# Altium PCB hazi_kiindulas.PcbDoc
Units mil, origin at the board's own origin, x right, y up, seen from the top; angles counter-clockwise.
Board outline 3550 x 2300 mil, 2 copper layers (Top Layer, Bottom Layer); 64 components, 87 nets, 342 pads, 22 vias.
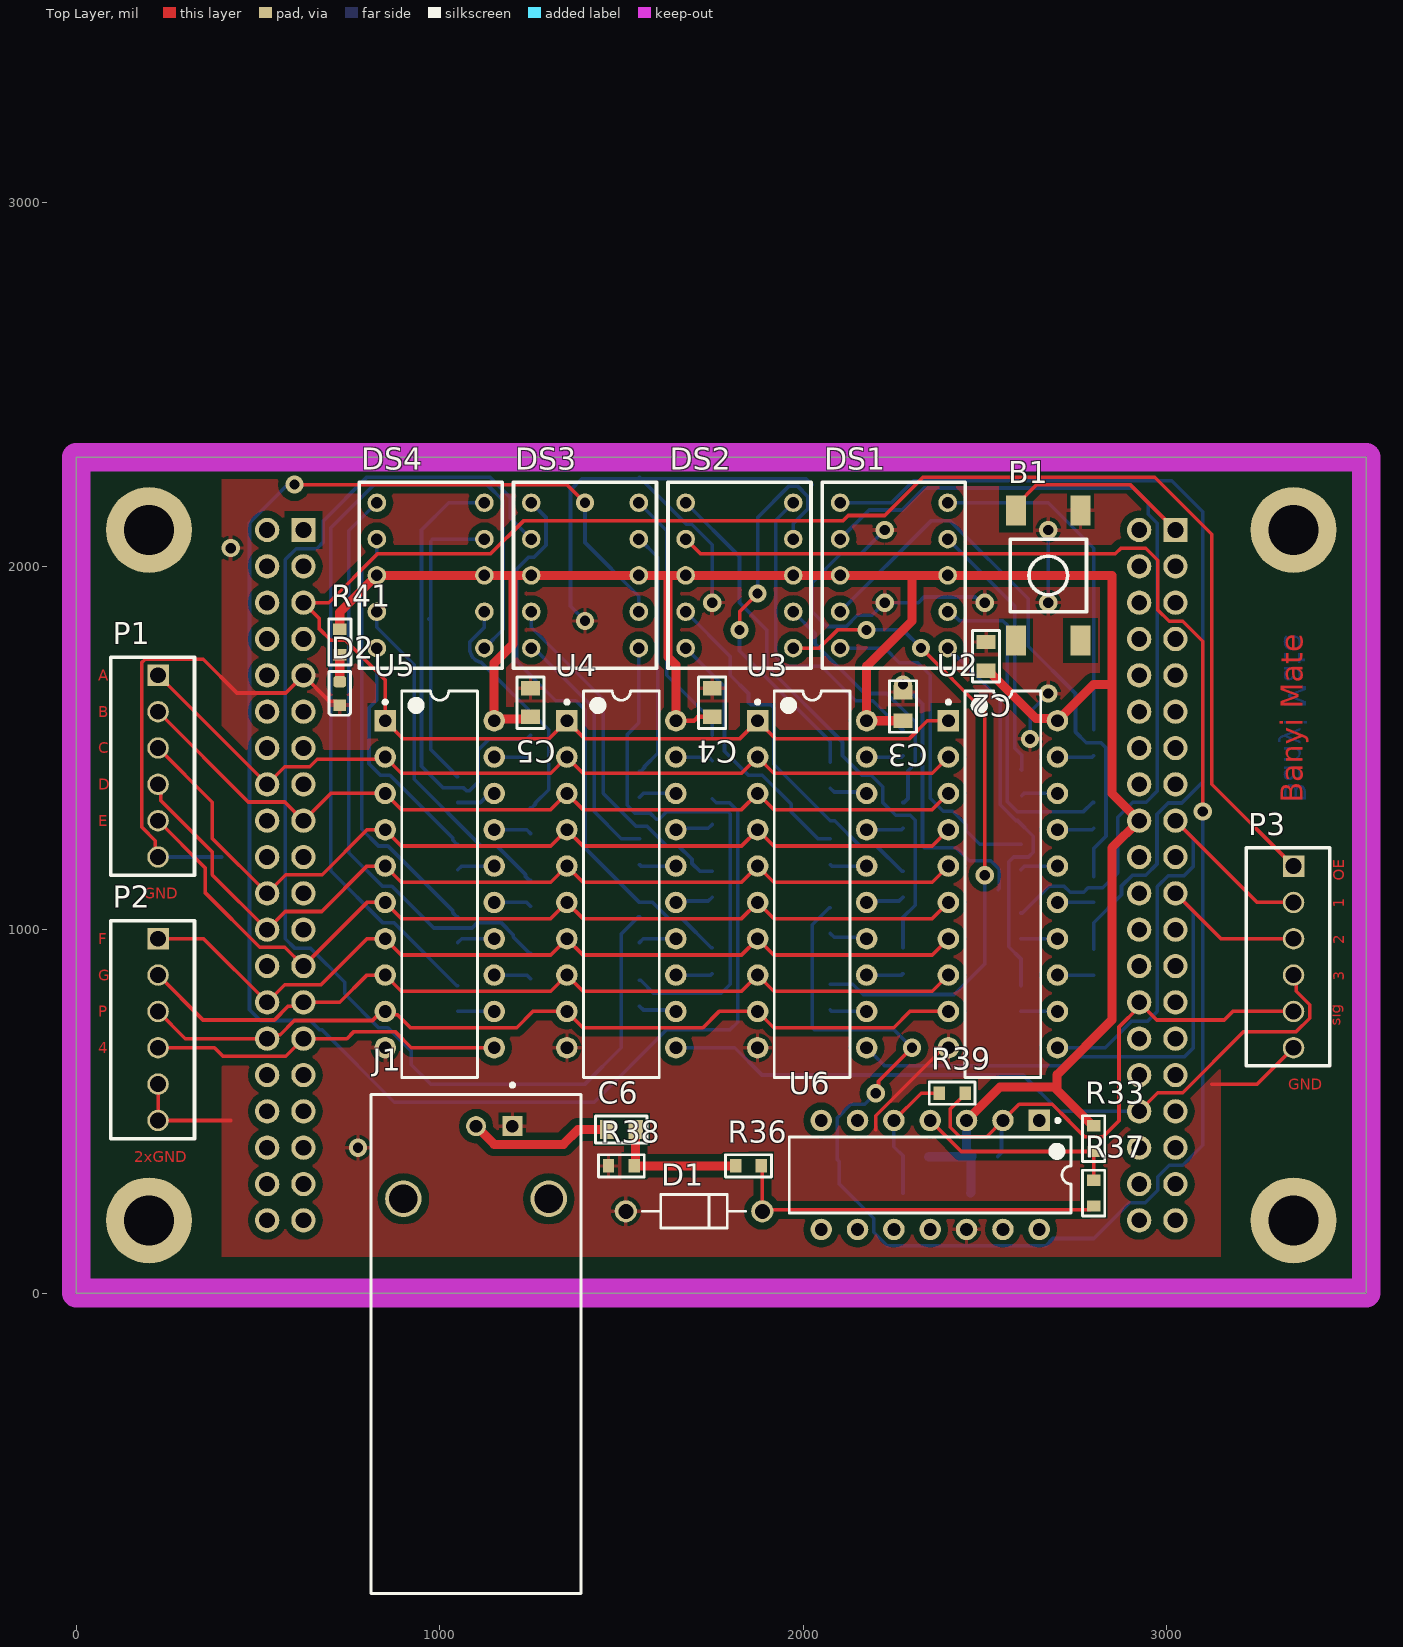
[diagram p0: Top Layer view]
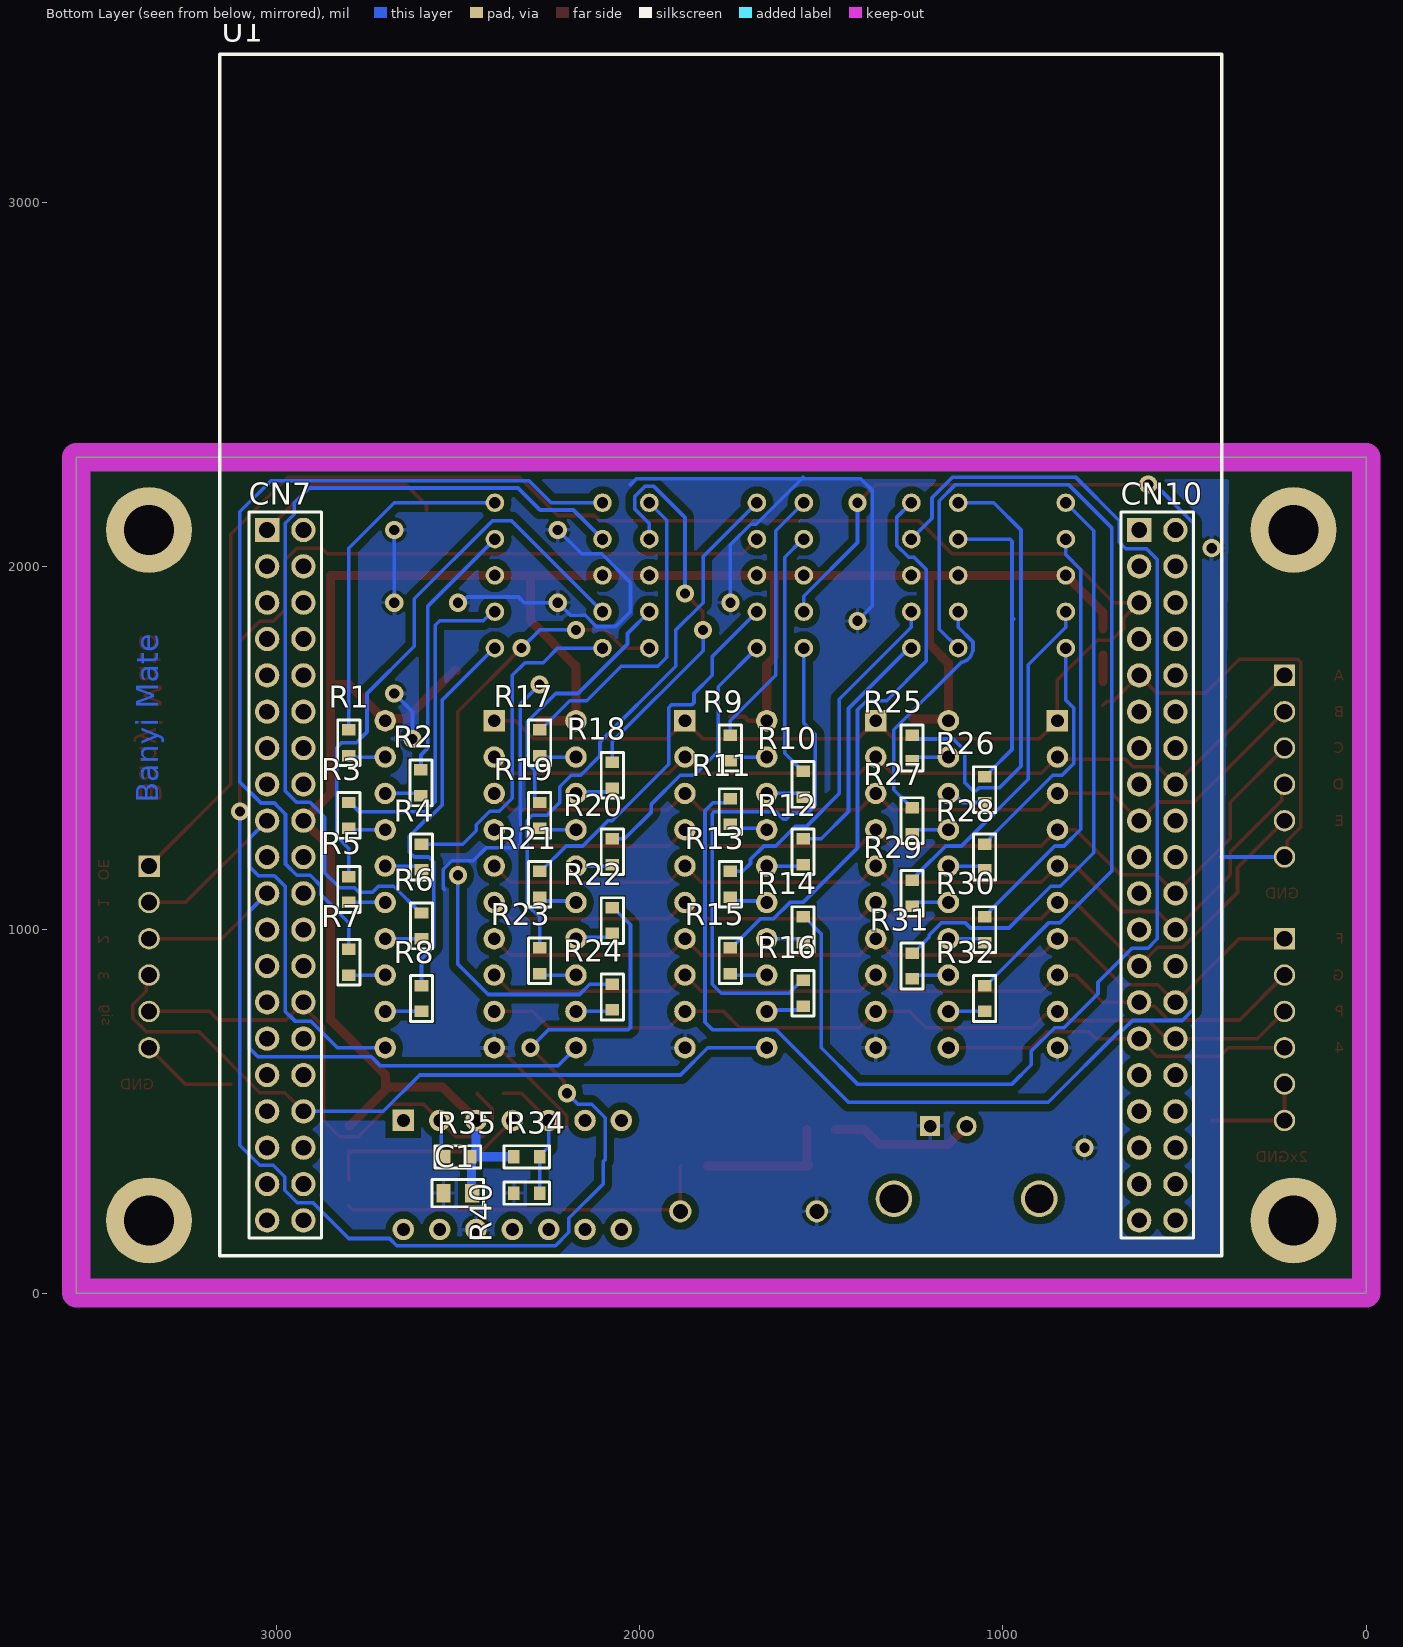
[diagram p1: Bottom Layer view, seen from below]
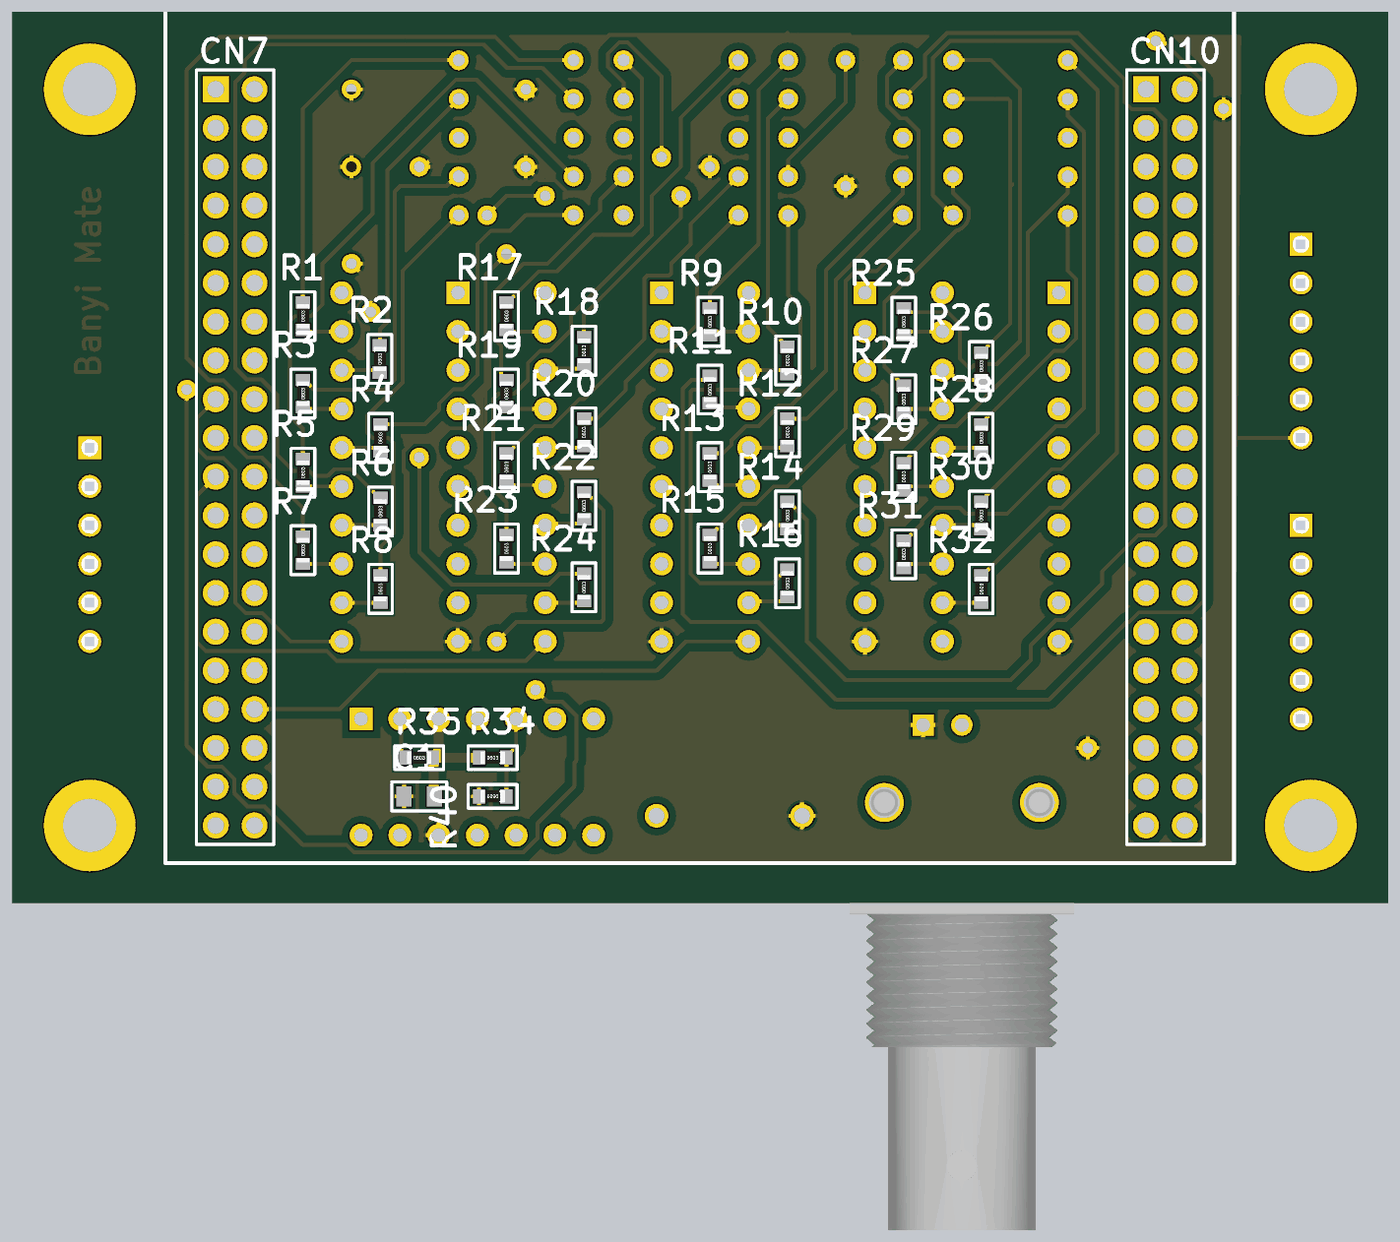
[diagram p2: 3D render of the assembled board from below, using the file's embedded part models]

## Layer stack, top to bottom
Top Solder: solder mask 0.4, Solder Resist, Dk 3.5
Top Layer: signal copper 1.4
Dielectric 1: dielectric 12.6, FR-4, Dk 4.8
Bottom Layer: signal copper 1.4
Bottom Solder: solder mask 0.4, Solder Resist, Dk 3.5

## Board outline
0,0 3550,0 3550,2300 0,2300

## Design rules (kind name [scope] priority, off if disabled: settings)
Clearance [All] p1: gap=10 ignorepadtopadclearanceinfootprint=FALSE except(0: Arc-Hole Track-Hole SMDPad-Hole THPad-Hole Via-Hole Fill-Hole Poly-Hole Region-Hole Text-Hole; 20: Arc-Poly Track-Poly SMDPad-Poly THPad-Poly Via-Poly Fill-Poly Poly-Poly)
HoleSize [All] p1: absolutevalues=TRUE maxlimit=196.85 minlimit=1 maxpercent=80.000 minpercent=20.000
PolygonConnect [All] p1: connectstyle=Relief reliefconductorwidth=10 reliefentries=4 polygonreliefangle="90 Angle" airgapwidth=10
RoutingVias [All] p1: holewidth=28 width=50 viastyle="Through Hole" minholewidth=28 minwidth=50 maxholewidth=28 maxwidth=50
SMDNeckDown [All] p1: percent=50.000
SolderMaskExpansion [All] p1: expansion=4 istentingtop=FALSE
Width [All] p1: maxlimit=100 minlimit=10 preferedwidth=10
29 further rules are at their usual default settings.

## Components (designator, comment, footprint, x,y, rotation, side; value= is the part's Value field where it differs from the comment)
B1 "Button" FP_BTN_SMD 2675,1975 r0 top
C1 "100nF" FP_0805_CAP_085 2500,275 r0 bottom
C2 "100nF" FP_0805_CAP_085 2503.51,1752.14 r270 top
C3 "100nF" FP_0805_CAP_085 2275,1614.37 r270 top
C4 "100nF" FP_0805_CAP_085 1750,1625 r270 top
C5 "100nF" FP_0805_CAP_085 1250,1625 r270 top
C6 "100nF" FP_0805_CAP_085 1500,450 r0 top
D1 "1N4007G" ONSC-AXIAL_LEAD-2-59-10_P 1700,225 r180 top
D2 "LED" FP_0805_LED_RED 725,1650 r270 top
DS1 "7SEG" FP_7SEG 2250,1975 r0 top
DS2 "7SEG" FP_7SEG 1825,1975 r0 top
DS3 "7SEG" FP_7SEG 1400,1975 r0 top
DS4 "7SEG" FP_7SEG 975,1975 r0 top
J1 "1-1337543-0" TECO-1-1337543-0_V 1100,259.25 r180 top
P1 "Connector" FP_CONN6_TAP_254MM 225,1700 r180 top
P2 "Connector" FP_CONN6_TAP_254MM 225,975 r180 top
P3 "Connector" FP_CONN6_TAP_254MM 3350,1175 r180 top
R1 "1K" FP_0603_RES 2799.99,1514.57 r90 bottom
R2 "1K" FP_0603_RES 2601.63,1404.13 r90 bottom
R3 "1K" FP_0603_RES 2799.99,1314.57 r90 bottom
R4 "1K" FP_0603_RES 2600,1200 r90 bottom
R5 "1K" FP_0603_RES 2800,1110.43 r90 bottom
R6 "1K" FP_0603_RES 2600,1010.43 r90 bottom
R7 "1K" FP_0603_RES 2800,910.43 r90 bottom
R8 "1K" FP_0603_RES 2600,810.43 r90 bottom
R9 "1K" FP_0603_RES 1750,1500 r90 bottom
R10 "1K" FP_0603_RES 1550,1400 r90 bottom
R11 "1K" FP_0603_RES 1750,1325 r90 bottom
R12 "1K" FP_0603_RES 1549.99,1214.57 r90 bottom
R13 "1K" FP_0603_RES 1750,1125 r90 bottom
R14 "1K" FP_0603_RES 1550,1000 r90 bottom
R15 "1K" FP_0603_RES 1749.99,914.57 r90 bottom
R16 "1K" FP_0603_RES 1550,825 r90 bottom
R17 "1K" FP_0603_RES 2274.99,1514.57 r90 bottom
R18 "1K" FP_0603_RES 2075,1425 r90 bottom
R19 "1K" FP_0603_RES 2274.99,1314.57 r90 bottom
R20 "1K" FP_0603_RES 2074.99,1214.57 r90 bottom
R21 "1K" FP_0603_RES 2275,1125 r90 bottom
R22 "1K" FP_0603_RES 2075,1025 r90 bottom
R23 "1K" FP_0603_RES 2274.99,914.57 r90 bottom
R24 "1K" FP_0603_RES 2074.99,814.57 r90 bottom
R25 "1K" FP_0603_RES 1250,1500 r90 bottom
R26 "1K" FP_0603_RES 1050,1385.43 r90 bottom
R27 "1K" FP_0603_RES 1250,1300 r90 bottom
R28 "1K" FP_0603_RES 1050,1200 r90 bottom
R29 "1K" FP_0603_RES 1250,1100 r90 bottom
R30 "1K" FP_0603_RES 1050,1000 r90 bottom
R31 "1K" FP_0603_RES 1250,900 r90 bottom
R32 "1K" FP_0603_RES 1050,810.43 r90 bottom
R33 "100K" FP_0603_RES 2800,425 r270 top
R34 "100K" FP_0603_RES 2310.43,374.99 r180 bottom
R35 "5K" FP_0603_RES 2500,375 r180 bottom
R36 "5K" FP_0603_RES 1850,350 r180 top
R37 "5K" FP_0603_RES 2800,275 r270 top
R38 "10K" FP_0603_RES 1500,350 r0 top
R39 "20M" FP_0603_RES 2410.43,550 r0 top
R40 "10K" FP_0603_RES 2310.43,275 r0 bottom
R41 "330" FP_0603_RES 725,1791.88 r90 top
U1 "NUCLEO-F446RE" FP_NUCLEO-64 3025,2100 r180 bottom locked
U2 "SN74HCT573N" N0020A 2550,1125 r0 top
U3 "SN74HCT573N" N0020A 2025,1125 r0 top
U4 "SN74HCT573N" N0020A 1500,1125 r0 top
U5 "SN74HCT573N" N0020A 1000,1125 r0 top
U6 "LM339N" N0014A 2350,325 r270 top

## Footprints (in the part's own frame and the unit in brackets; to place one, negate y for a bottom-side part, rotate by r counter-clockwise, add the part's x,y. Pads: shape width x height; smd on the part's side, far side on the other; paste and mask are expansions set on the pad)
FP_7SEG [mm]
  round 1.3 hole 0.8: 1(-3.76,5.08) 2(-3.76,2.54) 3(-3.76,0) 4(-3.76,-2.54) 5(-3.76,-5.08) 6(3.76,-5.08) 7(3.76,-2.54) 8(3.76,0) 9(3.76,2.54) 10(3.76,5.08)
  silkscreen extent -5,-6.5 5,6.5, body extent -5.13,-6.63 5.13,6.63, height 7
FP_0603_RES [mm] "0603 ellenállás"
  rect 0.8x0.95 smd: 1(-0.9,0) 2(0.9,0)
  silkscreen extent -1.6,-0.77 1.6,0.78, body extent -0.8,-0.4 0.8,0.4, height 0.44
FP_0805_CAP_085 [mm] "0805 kapacitás YAGEO 0.85mm magas"
  rect 1x1.3 smd: 1(-1,0) 2(1,0)
  silkscreen extent -1.8,-0.95 1.8,0.95, body extent -1,-0.64 1.03,0.64, height 0.85
FP_0805_LED_RED [mm] "0805 méretû piros LED"
  rrect50% 0.8x0.9 smd: A(-0.825,0)
  rect 0.8x0.9 smd: K(0.825,0)
  silkscreen extent -1.55,-0.75 1.53,0.75, body extent -1,-0.62 1.02,0.62, height 1.1
FP_BTN_SMD [mm] "SMD Push Button 6x6mm"
  rect 1.4x2.1 smd: 1(2.25,4.55) 2(2.25,-4.55) 3(-2.25,4.55) 4(-2.25,-4.55)
  silkscreen extent -2.67,-2.54 2.67,2.54, body extent -3,-5 3,5, height 5.1
FP_CONN6_TAP_254MM [mm] "álló hat pólusú tápcsatlakozó 2.54mm"
  rect 1.5x1.5 hole 1.1: 1(0,0)
  round 1.5 hole 1.1: 2(0,2.54) 3(0,5.08) 4(0,7.62) 5(0,10.16) 6(0,12.7)
  silkscreen extent -2.54,-1.27 3.3,13.97, body extent -2.52,-1.27 3.28,13.97, height 11.56
FP_NUCLEO-64 [mm]
  round 1.7 hole 1.1: 0(0,-48.26) 0(2.54,-48.26) 0(60.96,-48.26) 0(63.5,-48.26) 2(2.54,0) 3(0,-2.54) 4(2.54,-2.54) 5(0,-5.08) 6(2.54,-5.08) 7(0,-7.62) 8(2.54,-7.62) 9(0,-10.16) 10(2.54,-10.16) 11(0,-12.7) 12(2.54,-12.7) 13(0,-15.24) 14(2.54,-15.24) 15(0,-17.78) 16(2.54,-17.78) 17(0,-20.32) 18(2.54,-20.32) 19(0,-22.86) 20(2.54,-22.86) 21(0,-25.4) 22(2.54,-25.4) 23(0,-27.94) 24(2.54,-27.94) 25(0,-30.48) 26(2.54,-30.48) 27(0,-33.02) 28(2.54,-33.02) 29(0,-35.56) 30(2.54,-35.56) 31(0,-38.1) 32(2.54,-38.1) 33(0,-40.64) 34(2.54,-40.64) 35(0,-43.18) 36(2.54,-43.18) 37(0,-45.72) 38(2.54,-45.72) 40(63.5,0) 41(60.96,-2.54) 42(63.5,-2.54) 43(60.96,-5.08) 44(63.5,-5.08) 45(60.96,-7.62) 46(63.5,-7.62) 47(60.96,-10.16) 48(63.5,-10.16) 49(60.96,-12.7) 50(63.5,-12.7) 51(60.96,-15.24) 52(63.5,-15.24) 53(60.96,-17.78) 54(63.5,-17.78) 55(60.96,-20.32) 56(63.5,-20.32) 57(60.96,-22.86) 58(63.5,-22.86) 59(60.96,-25.4) 60(63.5,-25.4) 61(60.96,-27.94) 62(63.5,-27.94) 63(60.96,-30.48) 64(63.5,-30.48) 65(60.96,-33.02) 66(63.5,-33.02) 67(60.96,-35.56) 68(63.5,-35.56) 69(60.96,-38.1) 70(63.5,-38.1) 71(60.96,-40.64) 72(63.5,-40.64) 73(60.96,-43.18) 74(63.5,-43.18) 75(60.96,-45.72) 76(63.5,-45.72)
  rect 1.7x1.7 hole 1.1: 1(0,0) 39(60.96,0)
  silkscreen extent -3.3,-50.73 66.72,33.25, body extent -3.3,-50.72 66.72,33.25, height 11
N0014A [mm] "DIP, 14-Leads, Body 19.7x6.6mm, Pitch 2.54mm"
  rect 1.5x1.5 hole 0.9: 1(-3.81,7.62)
  round 1.5 hole 0.9: 2(-3.81,5.08) 3(-3.81,2.54) 4(-3.81,0) 5(-3.81,-2.54) 6(-3.81,-5.08) 7(-3.81,-7.62) 8(3.81,-7.62) 9(3.81,-5.08) 10(3.81,-2.54) 11(3.81,0) 12(3.81,2.54) 13(3.81,5.08) 14(3.81,7.62)
  silkscreen extent -3.93,-9.85 2.65,9.85, body extent -3.95,-9.85 3.95,9.85, height 5.08
N0020A [mm] "DIP, 20-Leads, Body 26.9x6.6mm, Pitch 2.54mm"
  rect 1.5x1.5 hole 0.9: 1(-3.81,11.43)
  round 1.5 hole 0.9: 2(-3.81,8.89) 3(-3.81,6.35) 4(-3.81,3.81) 5(-3.81,1.27) 6(-3.81,-1.27) 7(-3.81,-3.81) 8(-3.81,-6.35) 9(-3.81,-8.89) 10(-3.81,-11.43) 11(3.81,-11.43) 12(3.81,-8.89) 13(3.81,-6.35) 14(3.81,-3.81) 15(3.81,-1.27) 16(3.81,1.27) 17(3.81,3.81) 18(3.81,6.35) 19(3.81,8.89) 20(3.81,11.43)
  silkscreen extent -3.93,-13.5 2.65,13.5, body extent -3.95,-13.45 3.95,13.45, height 5.08
ONSC-AXIAL_LEAD-2-59-10_P [mm] "AXIAL, 2-Leads, Diameter 2.35mm"
  round 1.55 hole 1.05: 1(-4.77,0) 2(4.77,0)
  silkscreen extent -3.6,-1.18 3.6,1.18
TECO-1-1337543-0_V [mm] "SMD, 2-Leads, Body 34.9x14.7mm, Pitch 2.54mm"
  rect 1.4x1.4 hole 0.89: 1(-2.54,-5.08)
  round 1.4 hole 0.89: 2(0,-5.08)
  round 2.55 hole 2.01: MH1(-5.08,0) MH2(5.08,0)
  silkscreen extent -7.35,-8.07 7.35,27.6, body extent -7.35,-7.1 7.35,28.05, height 15.8

## Part data
B1: library part "Button 4P", "Push button", Name="TACT 6x 6 4P SPST 2 FSM4JSMA (TYC) 50mA 12VDC SMD H=5mm 160g BLACK B. 4-1437565-1", Reference=45-05-43, Supplier=Lomex
C1 C2 C3 C4 C5 C6: library part CAP, "Capacitor", Name="100nF 0805 10% 50V X7R 0805B104K500CT (WAL)", Reference=82-10-76, Supplier=Lomex
D1: library part CMP-0902-00143-1, "Standard Recovery Rectifier, 2-Pin Axial_Lead, Pb-Free, Bulk Bag", Manufacturer="On Semiconductor", ComponentLink1Description="Manufacturer URL", ComponentLink1URL=http://www.onsemi.com/, ComponentLink2Description=Datasheet, ComponentLink2URL=http://www.onsemi.com/pub_link/Collateral/1N4001-D.PDF, ComponentLink3Description="Package Specification", ComponentLink3URL=http://www.onsemi.cn/pub_link/Collateral/59-10.PDF, DatasheetVersion="Rev. 13", IFSM Max (A)=30, IO(rec) Max (A)=1, Mounting Technology="Through Hole", Name="0.15A 100V SWITCH 1N4148TR (VIS) trr<4nsec DO-35", PackageDescription="2-Pin, Axial Lead, Diameter 2.35 mm", PackageReference=AXIAL_LEAD-2-59-10, PackageVersion="Rev. U, 02/2005", Packing="Bulk Bag", PartNumber=1N4007G, Reference=16-01-04, RoHS=TRUE, Supplier=Lomex, Type="Standard Recovery", VRRM Max (V)=1000
D2: "Typical RED GaAs LED", Name="2012 GREEN 565nm 12mcd KP-2012SGD (KIN) GRE.DIFF. 2x1.2x1.1mm 0805 120°", Reference=95-00-21, Supplier=Lomex
DS1 DS2 DS3 DS4: "Common Anode 7 Segment Display", Name="FYS-3911BUHR-21 (FYL) 7 SEG SRED COM.AN.", Reference=35-03-94, Supplier=Lomex
J1: library part CMP-2000-05853-1, "Female Connector, Pitch 2.54 mm, 1 x 2 Position, Height 15.8 mm, Tail Length 3.8 mm,  / -55 to 85 degC, RoHS, Bulk", Frequency Max=4GHz, Manufacturer="TE Connectivity", Package Description="Female Connector, Pitch 2.54 mm, 1 x 2 Position, Height 15.8 mm, Tail Length 3.8 mm", Coaxial Cable Types=-, Coaxial Termination=Solder, Connector Body Style=RightAngleJack, Connector Mounting=PCBMount, Connector Type=BNCCoaxial, Contact Material=Brass, Contact Plating=GoldPlatedContacts, Datasheet URL=http://www.te.com/commerce/DocumentDelivery/DDEController?Action=showdoc&DocId=Customer+Drawing%7F1337543%7FG%7Fpdf%7FEnglish%7FENG_CD_1337543_G.pdf%7F1-1337543-0, Datasheet Version="Rev. G, 12/2012", Impedance=50ohm, Manufacturer URL=http://www.te.com/, Mounting Technology=ThroughHole, Name="BNC 1 P ANYA 90° BNC-S07HP (T-T) H-F 15.8mm 50R NYÁK 90° SZIGETELT CSAVAR NÉLKÜL !!", Package Reference=1-1337543-0, Product Range=-, Reference=43-15-22, Supplier=Lomex, SVHC=ToBeAdvised
P1 P2 P3: library part Connector_6pin, "6pin connector"
R1 R2 R3 R4 R5 R6 R7 R8 R9 R10 R11 R12 R13 R14 R15 R16 R17 R18 R19 R20 R21 R22 R23 R24 R25 R26 R27 R28 R29 R30 R31 R32 R33 R34 R35 R36 R37 R38 R39 R40 R41: library part RES, "Resistor", Supplier=Lomex
  R1 R2 R3 R4 R5 R6 R7 R8 R9 R10 R11 R12 R13 R14 R15 R16 R17 R18 R19 R20 R21 R22 R23 R24 R25 R26 R27 R28 R29 R30 R31 R32: Name="1K00 0603 5% WR06X102JTL 0.1W (WAL)", Reference=81-27-92
  R33 R34: Name="100K 0603 5% RC0603JR-10100KL 0.1W (YAG)", Reference=81-34-88
  R35 R36 R37: Name="5K10 0603 5% WR06X512JTL 0.1W (WAL)", Reference=81-28-96
  R38 R40: Name="10K0 0603 5% WR06X103JTL 0.1W (WAL)", Reference=81-29-03
  R39: Name="20M0 0603 5% RC0603JR-0720ML 0.1W (YAG)", Reference=81-27-41
  R41: Name="330R 0603 5% WR06X331JTL 0.1W (WAL)", Reference=81-17-48
U2 U3 U4 U5: library part CMP-1621-00374-2, "Octal Transparent D-Type Latches With 3-State Outputs, N0020A, TUBE", F @ Nom Voltage(Max)(Mhz)=25, Generic Part Number=SN74HCT573, ICC @ Nom Voltage(Max)(mA)=0.08, Manufacturer="Texas Instruments", Operating Temperature Range(C)="-40 to 85", Rating=Catalog, tpd @ Nom Voltage(Max)(ns)=40, Voltage(Nom)(V)=5, 3-State Output=Yes, Bits(#)=8, Code_JEDEC=MS-001, DatasheetVersion=SCLS176E, Input Type=TTL, Logic=True, Name="SN74HCT573N (TI) 8xD-TYPE TRANSPARENT LATCH 3-STATE OUTPUT DIP-20", Output Drive (IOL/IOH)(Max)(mA)=6/-6, Output Logic=Non-inverted, Output Type=CMOS, PackageReference=N0020A, Reference=30-09-06, Schmitt Trigger=No, Static Current=0.08, Supplier=Lomex, Technology Family=HCT, VCC(Max)(V)=5.5, VCC(Min)(V)=4.5
U6: library part CMP-0055-00143-3, "Low Power Low Offset Voltage Quad Comparator, 14-pin MDIP", Manufacturer="Texas Instruments", Package Reference=N0014A, PackageTopMarking=NSUZXYYTTE#*LM339N, PowerWise=N, Code_JEDEC=MS-001-AA, ComponentLink1Description="Datasheet URL", ComponentLink1URL=http://www.ti.com/general/docs/lit/getliterature.tsp?genericPartNumber=LM339&fileType=pdf, CompType=Amplifiers, Name="LM339N (TI) 4xVOLTAGE COMPARATOR DIP-14", PackageDescription="MDIP, .750 x .250 x.130in, 14 Lead, .100in Pitch", PinCount=14, Reference=Lomex, RoHS=N, Supplier=32-17-66
U1: Name="Nucleo F446RE", Reference=NUCLEO, Supplier=Tanszék

## Free pads (board coordinates)
  round 236.22 hole 137.8: ""(200,200) ""(200,2100) ""(3350,200) ""(3350,2100)

## Via types
v1: diameter 50, hole 28, Top Layer to Bottom Layer, 22 vias

## Nets (pads, with @x,y where several pads share a name; then routed paths per layer and width w, separated by ;. In a path a pad name is that pad's centre, name@x,y a point inside that pad or via, vN(x,y) a via of type N, cw(c..) or ccw(c..) an arc to the next point about the centre after c; other vN are vias at no path point)
GND: B1.1 C1.2 C2.1 C3.1 C4.1 C5.1 D1.2 D2.K J1.1 P1.6 P2.5 P2.6 P3.6 R38.1 R40.2 U1.47 U2.10 U3.10 U4.10 U5.10 U6.12 | length 5729.9
  Top Layer w10: P2.5 P2.6 425,475 ; P1.6 217.5,1207.5 217.5,1244.53 180.47,1281.56 180.47,1735.74 189.26,1744.53 349.31,1744.53 442.3,1651.54 576.54,1651.54 U1.47 696.73,1628.27 714.25,1628.27 D2.K ; 2200,450 2200,487.97 2387.03,675 U2.10 ; 3125,575 3250,575 P3.6
  Bottom Layer w10: P1.6 400,1200 ; v1(1400,1850) 1360,1890 1360,2210 1390.84,2240.84 1553.73,2240.84 ; 1550,2245.63 1550,2244.56 1553.73,2240.84 ; v1(1750,1900) 1750,2059.37 1693.78,2115.59 1678.97,2115.59 1553.73,2240.84 ; 2025,2225 2009.16,2240.84 1553.73,2240.84 ; v1(2225,2100) 2159.41,2034.41 2103.97,2034.41 2025,1955.44 2025,1875 2065.59,1834.41 2118.78,1834.41 2149.37,1865 2190,1865 v1(2225,1900) 2317.54,1900 2333.13,1915.59 2473.59,1915.59 2489.18,1900 v1(2500,1900) ; v1(2275,1675) 2328.71,1621.29 2328.71,1230.86 2334.56,1225 2422.3,1225 2457.3,1190 2516.57,1190 2540,1166.57 2540,1112.7 2537.3,1110 ; v1(2625,1525) 2625,1600 v1(2675,1650) ; v1(2675,1900) v1(2675,2100)
  other v1: 775,400 425,2050
LE1: P3.2 U1.17 U2.11 | length 1346
  Top Layer w10: U1.17 3250,1075 P3.2
  Bottom Layer w10: U2.11 2831.46,675 2904.93,748.46 2948.46,748.46 2975,775 2975,1118.54 3004.93,1148.46 3048.46,1148.46 3073.46,1173.46 3073.46,1251.54 U1.17
LE2: P3.3 U1.21 U3.11 | length 1762.6
  Top Layer w10: U1.21 3150,975 P3.3
  Bottom Layer w10: U3.11 2225,625 2712.97,625 2737.97,650 3050,650 3073.46,673.46 3073.46,1051.54 U1.21
LE3: P3.4 U1.34 U4.11 | length 2060.2
  Top Layer w10: U1.34 2976.54,551.54 3045.07,551.54 3213.07,719.53 3357.5,719.53 3394.53,756.56 3394.53,793.44 3357.5,830.47 3357.5,867.5 P3.4
  Bottom Layer w10: U4.11 1812.03,675 1887.03,600 2605.27,600 2705.27,500 U1.34
LE4: P2.4 U1.67 U5.11 | length 981.3
  Top Layer w10: P2.4 379.94,675 403.41,651.54 576.54,651.54 U1.67 744.66,700 764.19,719.53 877.19,719.53 921.72,675 U5.11
n_OE: P3.1 U1.43 U2.1 U3.1 U4.1 U5.1 | length 5830.9
  Top Layer w10: U2.1 2341.49,1575 2291.49,1525 1925,1525 U3.1 1825,1525 1400,1525 U4.1 1300,1525 900,1525 U5.1 850,1687.11 740.54,1796.56 700.08,1796.56 667.99,1828.65 667.99,1857.01 U1.43 694.56,1900 828.97,2034.41 1139.85,2034.41 1230.44,2125 2109.37,2125 2124.37,2140 2225.1,2140 2330.73,2245.63 2587.8,2245.63 2775,2245.63 2775.63,2245 2968.14,2245 3125,2088.14 3125,1400 P3.1
NetB1_3: B1.3 U1.1 | length 527.8
  Top Layer w10: B1.3 2586.42,2167.91 2643.5,2225 2900,2225 U1.1
NetC6_1: C6.1 J1.2 | length 398.3
  Top Layer w25: J1.2 1150.06,409.19 1236.88,409.19 1340.22,409.19 1381.02,450 C6.1
NetC6_2: C6.2 R36.2 R38.2 | length 380.8
  Top Layer w25: C6.2 1539.37,356.9 1535.43,352.96 R38.2 R36.2
NetD1_1: D1.1 R36.1 R37.2 | length 1044.2
  Top Layer w10: R36.1 1887.8,347.64 D1.1 1891.61,228.82 2789.26,228.82 R37.2
NetD2_1: D2.A R41.1 | length 74
  Top Layer w25: D2.A R41.1
NetDS1_1: DS1.1 R7.2 | length 2430.4
  Bottom Layer w10: DS1.1 2243.68,2175 2304.27,2235.59 3014.41,2235.59 3100,2150 3100,1406.46 3042,1348.46 3004.93,1348.46 2995,1338.54 2974.23,1317.77 2974.23,1180.69 2943.54,1150 2906.46,1150 2876.54,1120.07 2876.54,1095.87 2800.01,1019.34 R7.2
NetDS1_2: DS1.2 R6.2 | length 2344.6
  Bottom Layer w10: DS1.2 2181.97,2155 2273.68,2155 2334.27,2215.59 2909.41,2215.59 2950,2175 2950,2143.54 2975,2118.54 2975,1381.46 2944.31,1350.77 2907.23,1350.77 2866.07,1309.61 2866.07,1156.27 2824.92,1115.12 2784.46,1115.12 2772.17,1102.83 2735.14,1102.83 2718.44,1119.53 2676.62,1119.53 2602.96,1045.87 R6.2
NetDS1_4: DS1.4 R5.2 | length 1601.2
  Bottom Layer w10: DS1.4 2351.97,2125 2405.44,2125 2620,1910.44 2620,1780 2750,1650 2750,1544.34 2779.77,1514.56 2820.23,1514.56 2833.7,1501.09 2833.7,1257.18 2800.01,1223.48 R5.2
NetDS1_5: DS1.5 R4.2 | length 929
  Bottom Layer w10: DS1.5 2225,1775 2265,1735 2315,1735 2350,1700 2350,1362.03 2386.19,1325.84 2412.13,1325.84 2449.27,1288.7 2449.27,1272.57 2486.41,1235.43 R4.2
NetDS1_6: DS1.6 R8.2 | length 1096.3
  Bottom Layer w10: DS1.6 2400,1775 2542.5,1632.5 2542.5,1343.89 2585.75,1300.64 2590.46,1300.64 2633.71,1257.4 2633.71,1213.47 2620.23,1200 2579.77,1200 2566.3,1186.53 2566.3,953.04 2600.01,919.33 R8.2
NetDS1_7: DS1.7 R3.2 | length 924.4
  Bottom Layer w10: DS1.7 2405.44,1875 2430.44,1850 2550,1850 2562.5,1837.5 2562.5,1352.17 2589.67,1325 2772.05,1325 2797.05,1350 R3.2
NetDS1_9: DS1.9 R2.2 | length 722.1
  Bottom Layer w10: DS1.9 2582.5,1890.53 2582.5,1500 2601.64,1480.86 R2.2 R2.2@2600,1441.21
NetDS1_10: DS1.10 R1.2 | length 953.7
  Bottom Layer w10: DS1.10 2675,2175 2800,2050 R1.2
NetDS2_1: DS2.1 R23.2 | length 1539.5
  Bottom Layer w10: DS2.1 1825,2026.97 1825,1900 1900,1825 1900,1725 2108.71,1516.29 2108.71,1478.32 2162.03,1425 2187.97,1425 2219.53,1393.44 2219.53,1349.81 2254.78,1314.56 2295.23,1314.56 2308.71,1301.08 2308.71,1067.61 2275,1033.9 R23.2
NetDS2_2: DS2.2 R22.2 | length 5383.2
  Top Layer w10: DS2.2 1717.56,2034.41 2859.41,2034.41 2875,2050 2943.54,2050 2976.54,2017 2976.54,1879.93 3008,1848.46 3045.07,1848.46 3100,1793.54 v1(3100,1325) ; v1(2200,550) 2207.65,557.65 2207.65,582.65 v1(2300,675)
  Bottom Layer w10: R22.2 2072.05,1060.43 2025,1013.38 2025,730.86 2030.86,725 2250,725 v1(2300,675) ; v1(2200,550) 2169.53,519.53 2131.56,519.53 2094.53,482.5 2094.53,367.37 2100,361.9 2100,300 2194.53,205.47 2194.53,167.5 2231.56,130.47 2668.44,130.47 2687.97,150 2800,150 2898.46,248.46 2942,248.46 2976.54,283 2976.54,320.07 3008,351.54 3045.07,351.54 3100,406.46 v1(3100,1325)
NetDS2_4: DS2.4 R21.2 | length 1029.8
  Bottom Layer w10: DS2.4 1800,1751.97 1800,1700 1850,1650 1850,1625.39 1855.86,1619.53 1910.74,1619.53 1919.53,1610.74 1919.53,1455.47 2075,1300 2087.03,1300 2156.56,1230.47 2202.01,1230.47 2272.05,1160.43 R21.2
NetDS2_5: DS2.5 R20.2 | length 731.9
  Bottom Layer w10: DS2.5 1783.71,1668.26 1783.71,1491.29 1850,1425 1887.97,1425 1967.37,1345.6 1967.37,1323.93 2041.3,1250 R20.2
NetDS2_6: DS2.6 R24.2 | length 1806.8
  Top Layer w10: DS2.6 2044.56,1775 2094.56,1825 v1(2175,1825) ; v1(2325,1775) 2500,1600 v1(2500,1150)
  Bottom Layer w10: R24.2 2137.03,850 2165.31,821.72 2416.25,821.72 2500,905.47 v1(2500,1150) ; v1(2175,1825) 2275,1825 v1(2325,1775)
NetDS2_7: DS2.7 R19.2 | length 715.5
  Bottom Layer w10: DS2.7 2033.03,1815 2033.03,1786.53 2169.56,1650 2230.66,1650 2308.7,1571.96 2308.7,1457.18 2288.7,1437.18 2288.7,1360.75 2277.95,1350 R19.2
NetDS2_9: DS2.9 R18.2 | length 1118.3
  Top Layer w10: v1(1825,1825) 1825.82,1825.82 1825.82,1875.82 v1(1875,1925)
  Bottom Layer w10: v1(1825,1825) 1825,1767.68 2075.01,1517.68 R18.2 ; v1(1875,1925) 1875,2134.37 1961.47,2220.84 1984.6,2220.84 2013.62,2191.81 2013.62,2158.19 1973.03,2117.6 DS2.9
NetDS2_10: DS2.10 R17.2 | length 877.7
  Bottom Layer w10: DS2.10 1925,2126.97 1925,1750 1950,1725 2050,1725 2145,1630 2192.05,1630 2272.05,1550 R17.2
NetDS3_1: DS3.1 R15.2 | length 1583.5
  Bottom Layer w10: DS3.1 1292.56,2134.41 1292.56,2058.19 1259.37,2025 1244.56,2025 1211.38,1991.81 1211.38,1738.62 1319.63,1630.37 1374.9,1630.37 1400,1605.27 1400,1225 1550,1075 1586.02,1075 1630.55,1030.47 1666.57,1030.47 1747.05,950 R15.2
NetDS3_2: DS3.2 R14.2 | length 3508.6
  Bottom Layer w10: DS3.2 1195,2131.97 1195,2188.72 1138.09,2245.63 800,2245.63 680,2125.63 680,2066.86 661.61,2048.46 604.93,2048.46 575,2018.54 575,975 601.54,948.46 645.07,948.46 738.32,855.22 738.32,823.71 831.56,730.47 857.5,730.47 921.72,666.25 921.72,628.28 975,575 1400,575 1500,675 1500,988.38 1547.05,1035.43 R14.2
NetDS3_4: DS3.4 R13.2 | length 977.5
  Bottom Layer w10: DS3.4 1251.97,1832.4 1450,1634.37 1450,1375 1540.78,1284.22 1571.44,1284.22 1625.19,1230.47 1657.5,1230.47 1694.53,1193.44 1694.53,1182.21 1716.31,1160.43 R13.2
NetDS3_5: DS3.5 R12.2 | length 681.6
  Bottom Layer w10: DS3.5 1258.55,1775 1425,1608.55 1425,1325 1500,1250 R12.2
NetDS3_6: DS3.6 R16.2 | length 1500.4
  Bottom Layer w10: DS3.6 1548.03,1569.1 1516.3,1537.36 1516.3,1342.6 1537.6,1321.3 1578.7,1321.3 1595.86,1304.14 1604.14,1304.14 1625,1325 1794.14,1325 1800,1319.14 1800,850 1775,825 1588.39,825 1552.96,860.43 R16.2
NetDS3_7: DS3.7 R11.2 | length 4895.4
  Top Layer w10: v1(600,2225) 1350,2225 v1(1400,2175)
  Bottom Layer w10: v1(600,2225) 581.46,2225 476.54,2120.07 476.54,779.93 506.46,750 643.54,750 668.54,725 675,725 875,525 1425,525 1625,725 1800,725 1820,745 1820,1327.43 1797.74,1349.69 1760.75,1349.69 R11.2 ; v1(1400,2175) 1400,2065.63 1548.03,1917.6 DS3.7
NetDS3_9: DS3.9 R10.2 | length 684.7
  Bottom Layer w10: DS3.9 1550,2075 1600,2025 1600,1485.43 1563.71,1449.13 1563.71,1446.18 1552.96,1435.43 R10.2
NetDS3_10: DS3.10 R9.2 | length 723.2
  Bottom Layer w10: DS3.10 1625,2098.03 1625,1700 1750.01,1574.99 R9.2
NetDS4_1: DS4.1 R31.2 | length 1624.9
  Bottom Layer w10: DS4.1 750,2098.03 750,1212.03 842.5,1119.53 868.44,1119.53 983.29,1004.69 1089.35,1004.69 1104.19,1019.53 1168.44,1019.53 1202.37,985.6 1202.37,980.11 1247.05,935.43 R31.2
NetDS4_2: DS4.2 R30.2 | length 1183.3
  Bottom Layer w10: DS4.2 826.97,2032.4 785.47,1990.91 785.47,1276.56 831.56,1230.47 857.5,1230.47 1036.31,1051.67 1036.31,1046.18 1047.05,1035.43 R30.2
NetDS4_4: DS4.4 R29.2 | length 942.1
  Bottom Layer w10: DS4.4 826.97,1832.4 929.97,1729.4 929.97,1414.37 1113.87,1230.47 1157.5,1230.47 1236.31,1151.67 1236.31,1146.18 1247.05,1135.43 R29.2
NetDS4_5: DS4.5 R28.2 | length 666.7
  Bottom Layer w10: DS4.5 826.97,1632.24 805.47,1610.74 805.47,1456.56 837.03,1425 862.97,1425 1036.31,1251.67 1036.31,1246.18 1047.05,1235.43 R28.2
NetDS4_6: DS4.6 R32.2 | length 2394.3
  Bottom Layer w10: R32.2 1047.05,845.87 873.39,1019.53 842.5,1019.53 700,1162.03 700,2105.44 819.56,2225 1130.44,2225 1175,2180.44 1175,2123.68 1175,1826.97 DS4.6
NetDS4_7: DS4.7 R27.2 | length 671.5
  Bottom Layer w10: DS4.7 1123.03,1832.4 1082.44,1791.81 1082.44,1767.56 1083.3,1766.7 ccw(c1123.03,1775) 1114.73,1735.27 1300,1550 1300,1385.43 1263.71,1349.13 1263.71,1346.18 1252.96,1335.43 R27.2
NetDS4_9: DS4.9 R26.2 | length 838.6
  Bottom Layer w10: 970,1855 975,1850 ; R26.2 1047.05,1420.87 1036.31,1431.61 1036.31,1434.57 975,1495.87 975,1850 ; DS4.9 980.86,2075 975,2069.14 975,1850
NetDS4_10: DS4.10 R25.2 | length 1297.4
  Bottom Layer w10: DS4.10 1025,2175 950,2100 950,1450 1009.88,1390.12 1065.54,1390.12 1073.69,1381.97 1081.97,1381.97 1105.47,1405.47 1105.47,1493.44 1136.71,1524.69 1239.26,1524.69 R25.2
NetR1_1: R1.1 U2.19 | length 101.7
  Bottom Layer w10: U2.19 2795.86,1475 R1.1
NetR2_1: R2.1 U2.18 | length 101
  Bottom Layer w10: R2.1 2607.93,1375 U2.18
NetR3_1: R3.1 U2.17 | length 101.7
  Bottom Layer w10: U2.17 2795.86,1275 R3.1
NetR4_1: R4.1 U2.16 | length 104.3
  Bottom Layer w10: R4.1 2610.43,1175 U2.16
NetR5_1: R5.1 U2.15 | length 100
  Bottom Layer w10: U2.15 R5.1
NetR6_1: R6.1 U2.14 | length 100
  Bottom Layer w10: R6.1 U2.14
NetR7_1: R7.1 U2.13 | length 100
  Bottom Layer w10: U2.13 R7.1
NetR8_1: R8.1 U2.12 | length 100
  Bottom Layer w10: R8.1 U2.12
NetR9_1: R9.1 U4.19 | length 104.3
  Bottom Layer w10: U4.19 1739.57,1475 R9.1
NetR10_1: R10.1 U4.18 | length 104.3
  Bottom Layer w10: R10.1 1560.43,1375 U4.18
NetR11_1: R11.1 U4.17 | length 106
  Bottom Layer w10: U4.17 1653.82,1278.82 1739.25,1278.82 R11.1
NetR12_1: R12.1 U4.16 | length 101.7
  Bottom Layer w10: R12.1 1554.13,1175 U4.16
NetR13_1: R13.1 U4.15 | length 106
  Bottom Layer w10: U4.15 1653.82,1078.82 1739.25,1078.82 R13.1
NetR14_1: R14.1 U4.14 | length 104.3
  Bottom Layer w10: R14.1 1560.43,975 U4.14
NetR15_1: R15.1 U4.13 | length 101.7
  Bottom Layer w10: U4.13 1745.86,875 R15.1
NetR16_1: R16.1 U4.12 | length 106
  Bottom Layer w10: R16.1 1560.75,778.82 1646.18,778.82 U4.12
NetR17_1: R17.1 U3.19 | length 101.7
  Bottom Layer w10: U3.19 2270.86,1475 R17.1
NetR18_1: R18.1 U3.18 | length 106
  Bottom Layer w10: R18.1 2085.75,1378.82 2171.18,1378.82 U3.18
NetR19_1: R19.1 U3.17 | length 101.7
  Bottom Layer w10: U3.17 2270.86,1275 R19.1
NetR20_1: R20.1 U3.16 | length 101.7
  Bottom Layer w10: R20.1 2079.13,1175 U3.16
NetR21_1: R21.1 U3.15 | length 106
  Bottom Layer w10: U3.15 2178.82,1078.82 2264.25,1078.82 R21.1
NetR22_1: R22.1 U3.14 | length 106
  Bottom Layer w10: R22.1 2085.75,978.82 2171.18,978.82 U3.14
NetR23_1: R23.1 U3.13 | length 101.7
  Bottom Layer w10: U3.13 2270.86,875 R23.1
NetR24_1: R24.1 U3.12 | length 101.7
  Bottom Layer w10: R24.1 2079.13,775 U3.12
NetR25_1: R25.1 U5.19 | length 104.3
  Bottom Layer w10: U5.19 1239.57,1475 R25.1
NetR26_1: R26.1 U5.18 | length 110.4
  Bottom Layer w10: R26.1 1112.03,1350 1137.03,1375 U5.18
NetR27_1: R27.1 U5.17 | length 104.3
  Bottom Layer w10: U5.17 1239.57,1275 R27.1
NetR28_1: R28.1 U5.16 | length 104.3
  Bottom Layer w10: R28.1 1060.43,1175 U5.16
NetR29_1: R29.1 U5.15 | length 104.3
  Bottom Layer w10: U5.15 1239.57,1075 R29.1
NetR30_1: R30.1 U5.14 | length 104.3
  Bottom Layer w10: R30.1 1060.43,975 U5.14
NetR31_1: R31.1 U5.13 | length 104.3
  Bottom Layer w10: U5.13 1239.57,875 R31.1
NetR32_1: R32.1 U5.12 | length 100
  Bottom Layer w10: R32.1 U5.12
NetR33_2: R33.2 R37.1 U6.4 | length 564.5
  Top Layer w10: U6.4 2435.43,389.57 R33.2 R37.1
NetR34_2: R34.2 R39.1 R40.1 U6.5 | length 366.4
  Top Layer w10: U6.5 2325,550 R39.1
  Bottom Layer w10: U6.5 2250,402.95 2275,377.95 R34.2 R40.1
seg_A: P1.1 U1.54 U2.2 U3.2 U4.2 U5.2 | length 2441
  Top Layer w10: P1.1 U1.54 573.46,1448.46 642,1448.46 662.79,1469.25 844.25,1469.25 U5.2 894.53,1430.47 1305.47,1430.47 U4.2 1394.53,1430.47 1830.47,1430.47 U3.2 1919.53,1430.47 2355.47,1430.47 U2.2
seg_B: P1.2 U1.55 U2.3 U3.3 U4.3 U5.3 | length 2441
  Top Layer w10: P1.2 473.46,1351.54 573.46,1351.54 U1.55 700,1375 U5.3 894.53,1330.47 1305.47,1330.47 U4.3 1394.53,1330.47 1830.47,1330.47 U3.3 1919.53,1330.47 2355.47,1330.47 U2.3
seg_C: P1.3 U1.60 U2.4 U3.4 U4.4 U5.4 | length 2582.4
  Top Layer w10: P1.3 374.25,1350.75 374.25,1250.75 U1.60 576.54,1151.54 676.54,1151.54 800,1275 U5.4 894.53,1230.47 1305.47,1230.47 U4.4 1394.53,1230.47 1830.47,1230.47 U3.4 1919.53,1230.47 2355.47,1230.47 U2.4
seg_D: P1.4 U1.62 U2.5 U3.5 U4.5 U5.5 | length 2582.4
  Top Layer w10: P1.4 232.5,1392.5 232.5,1355.47 374.25,1213.72 374.25,1150.75 U1.62 575,1050 675,1050 800,1175 U5.5 894.53,1130.47 1305.47,1130.47 U4.5 1394.53,1130.47 1830.47,1130.47 U3.5 1919.53,1130.47 2355.47,1130.47 U2.5
seg_DP: P2.3 U1.68 U2.9 U3.9 U4.9 U5.9 | length 2347.8
  Top Layer w10: P2.3 300,700 U1.68 535.89,710.89 560.89,710.89 600,750 815.1,750 840.1,775 U5.9 858.99,766.01 883.99,766.01 919.53,730.47 1211.88,730.47 1256.4,775 U4.9 1394.53,730.47 1724.38,730.47 1768.9,775 U3.9 1919.53,730.47 2249.38,730.47 2293.9,775 U2.9
seg_E: P1.5 U1.63 U2.6 U3.6 U4.6 U5.6 | length 2564
  Top Layer w10: P1.5 354.25,1170.75 354.25,1102.21 504.93,951.54 573.46,951.54 U1.63 800,1075 U5.6 894.53,1030.47 1305.47,1030.47 U4.6 1394.53,1030.47 1830.47,1030.47 U3.6 1919.53,1030.47 2355.47,1030.47 U2.6
seg_F: P2.1 U1.66 U2.7 U3.7 U4.7 U5.7 | length 2430.6
  Top Layer w10: P2.1 350,975 U1.66 573.46,848.46 673.46,848.46 800,975 U5.7 894.53,930.47 1305.47,930.47 U4.7 1394.53,930.47 1830.47,930.47 U3.7 1919.53,930.47 2355.47,930.47 U2.7
seg_G: P2.2 U1.65 U2.8 U3.8 U4.8 U5.8 | length 2387.9
  Top Layer w10: P2.2 348.46,751.54 545.07,751.54 582.65,789.11 614.11,789.11 U1.65 725,800 800,875 U5.8 894.53,830.47 1305.47,830.47 U4.8 1394.53,830.47 1830.47,830.47 U3.8 1919.53,830.47 2355.47,830.47 U2.8
signal: P3.5 R35.1 R39.2 U1.28 U6.2 | length 1587.4
  Top Layer w10: R39.2 2445.87,547.05 2405.47,506.66 2405.47,456.56 2431.56,430.47 2505.47,430.47 U6.2 2594.53,519.53 2685.74,519.53 2730.41,474.86 2730.41,474.36 2775.09,429.69 2824.91,429.69 2869.51,474.28 2869.51,732.04 2925,787.53 U1.28 2973.46,751.54 3159.09,751.54 3182.56,775 P3.5
  Bottom Layer w10: R35.1 2546.18,385.75 2546.18,471.18 U6.2
VCC: C1.1 C2.2 C3.2 C4.2 C5.2 DS1.3 DS1.8 DS2.3 DS2.8 DS3.3 DS3.8 DS4.3 DS4.8 R33.1 R34.1 R35.2 R41.2 U1.18 U2.20 U3.20 U4.20 U5.20 U6.3 | length 6553.4
  Top Layer w12: U4.20 1700,1575 1710.63,1585.63 C4.2
  Top Layer w25: R41.2 725,1873.03 DS4.3 DS4.8 1200,1975 ; C5.2 1244.69,1580.32 1155.32,1580.32 U5.20 1150,1733.96 1201.74,1785.7 1201.74,1973.26 1200,1975 ; U4.20 1650,1729.01 1628.88,1750.13 1628.88,1971.12 1625,1975 ; C3.2 U3.20 2175,1725 2300,1850 2300,1975 ; U6.3 2542.48,567.48 2690,567.48 2699.29,558.19 ; C2.2 2509.42,1712.77 2640.66,1581.52 2693.48,1581.52 U2.20 2800,1675 2850,1675 ; R33.1 2797.05,460.43 2699.29,558.19 ; 1200,1975 DS3.3 DS3.8 1625,1975 ; 1625,1975 DS2.3 DS2.8 DS1.3 2300,1975 ; 2300,1975 DS1.8 2850,1975 2850,1675 ; 2699.29,558.19 2699.29,600.71 2850,751.42 2850,1225 U1.18 2850,1375 2850,1675
  Bottom Layer w25: DS4.3@825,1975 DS4.3 ; R34.1 R35.2 ; U6.3 2450,392.52 2464.57,377.96 R35.2 ; C1.1 2462.6,276.97 2462.6,373.04 R35.2
pads on no net: B1.2 B1.4 J1.MH1 J1.MH2 U1.0 U1.2 U1.3 U1.4 U1.5 U1.6 U1.7 U1.8 U1.9 U1.10 U1.11 U1.12 U1.13 U1.14 U1.15 U1.16 U1.19 U1.20 U1.22 U1.23 U1.24 U1.25 U1.26 U1.27 U1.29 U1.30 U1.31 U1.32 U1.33 U1.35 U1.36 U1.37 U1.38 U1.39 U1.40 U1.41 U1.42 U1.44 U1.45 U1.46 U1.48 U1.49 U1.50 U1.51 U1.52 U1.53 U1.56 U1.57 U1.58 U1.59 U1.61 U1.64 U1.69 U1.70 U1.71 U1.72 U1.73 U1.74 U1.75 U1.76 U6.1 U6.6 U6.7 U6.8 U6.9 U6.10 U6.11 U6.13 U6.14

## Polygon pours and split planes (outlines as drawn)
GND on Top Layer "GND_L01_P012" (solid, remove dead copper, pour order 12): 400,2250 400,100 3150,100 3150,2250
GND on Top Layer "GND_L01_P001" (solid, remove dead copper, pour order 1): 2250,650
GND on Top Layer "GND_L01_P000" (solid, remove dead copper, pour order 0): 2250,725
GND on Bottom Layer "GND_L02_P011" (solid, remove dead copper, pour order 11): 378.43,2300 400,100 3150,100 3150,2300
GND on Bottom Layer "GND_L02_P004" (solid, remove dead copper, pour order 4): 375,2325
GND on Bottom Layer "GND_L02_P003" (solid, remove dead copper, pour order 3): 1875,350

## Keep-outs
Keep-Out Layer:
  the board outline again, w78.74

## Other copper
Top Layer:
  text "A" at 60,1685 h30
  text "B" at 60,1585 h30
  text "C" at 60,1485 h30
  text "D" at 60,1385 h30
  text "Banyi Mate" at 3375,1350 h60 r90
  text "E" at 60,1285 h30
  text "OE" at 3490,1135 h30 r90
  text "GND" at 185,1085 h30
  text "1" at 3490,1060 h30 r90
  text "F" at 60,960 h30
  text "2" at 3490,960 h30 r90
  text "G" at 60,860 h30
  text "3" at 3490,860 h30 r90
  text "P" at 60,760 h30
  text "sig" at 3480,735 h30 r90
  text "4" at 60,660 h30
  text "GND" at 3335,560 h30
  text "2xGND" at 160,360 h30
Bottom Layer:
  text "Banyi Mate" at 3325,1350 h60 r270

## Silkscreen, mask and mechanical layers (free items; w line width, h text height)
Mechanical 1:
  the board outline again, w10

## Text inside footprints (layer, text, board x,y; h text height)
U1: Bottom Overlay "CN10" at 675,2170 h60; Bottom Overlay "CN7" at 3075,2170 h60